# Altium PCB 光电插板1路.PCBDOC
Units mm, origin at the board's own origin, x right, y up, seen from the top; angles counter-clockwise.
Board outline 85.45 x 30.8 mm, 2 copper layers (Top Layer, Bottom Layer); 20 components, 16 nets, 47 pads, 14 vias.
Unrouted connection lines stored in the file: 2.
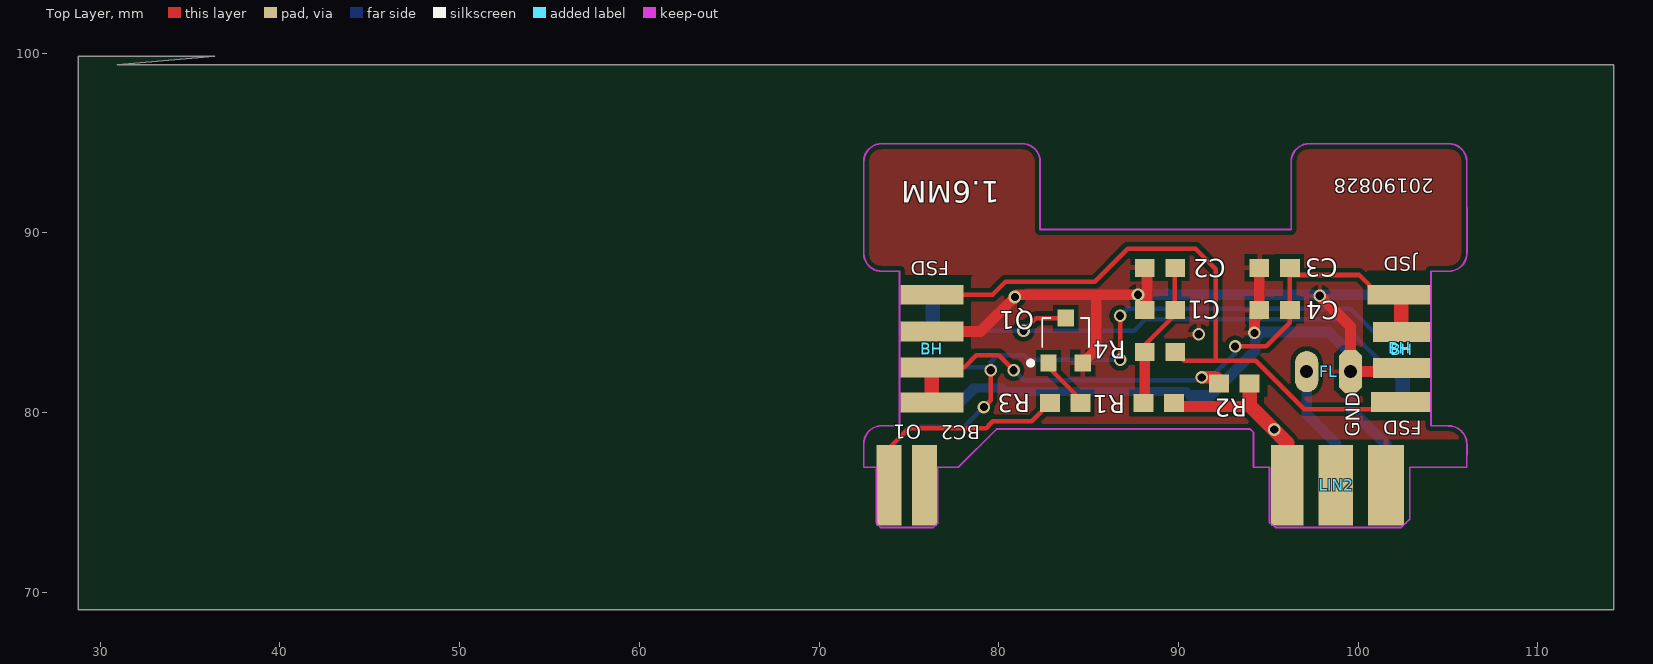
[diagram p0: Top Layer view]
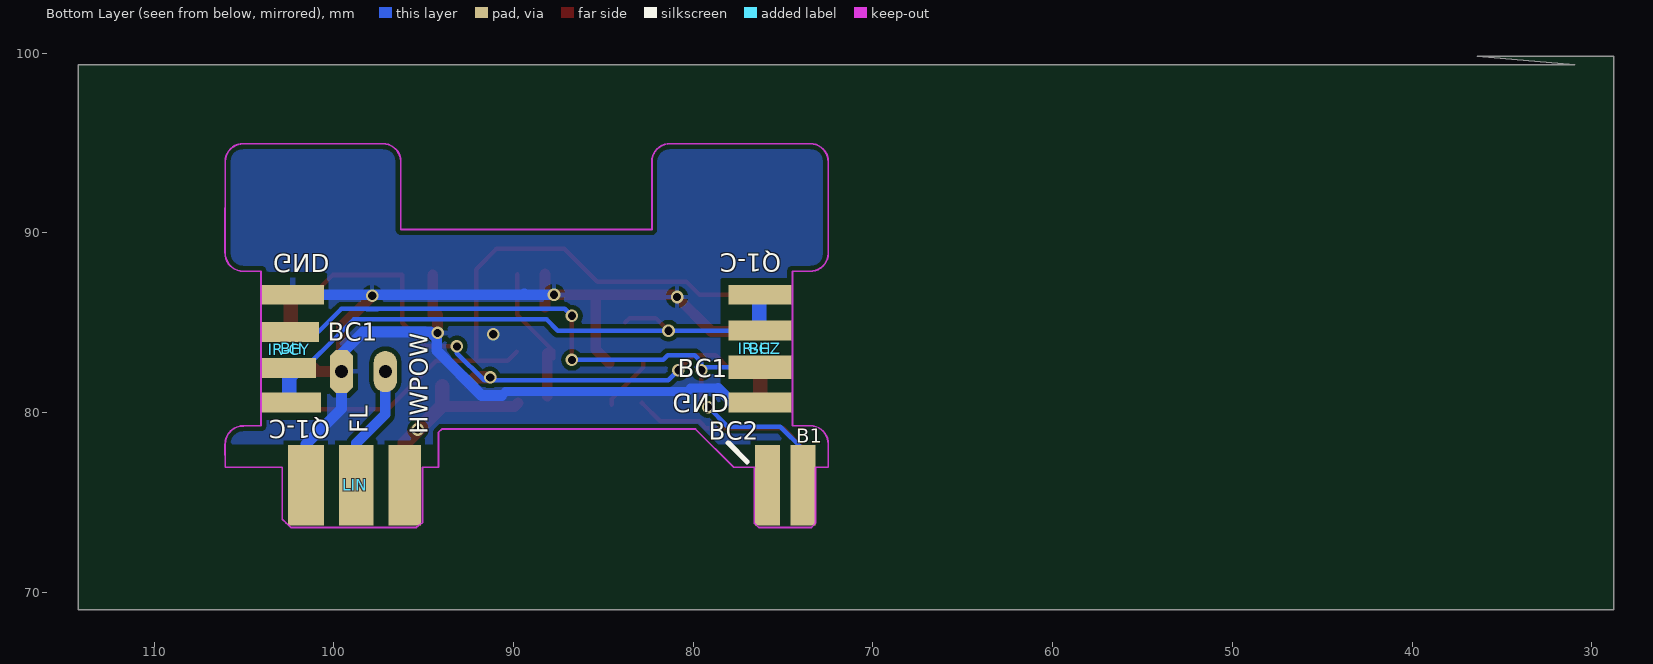
[diagram p1: Bottom Layer view, seen from below]

## Layer stack, top to bottom
Top Layer: signal copper 0.0356
Dielectric: dielectric 0.32, FR-4, Dk 4.8
Bottom Layer: signal copper 0.0356

## Board outline
30.95,99.35 114.225,99.35 114.225,69.025 28.775,69.025 28.775,99.825 36.375,99.825

## Design rules (kind name [scope] priority, off if disabled: settings)
Clearance [All] p1: gap=0.254
FabricationTestPointUsage TestPointUsage [All] p1: valid=0 allowmultiple=FALSE
FabricationTestpoint Testpoint [All] p1: side=3 testpointundercomponent=TRUE minsize=1.016 maxsize=2.54 preferedsize=1.524 minholesize=0 maxholesize=1.016 preferedholesize=0.813 testpointgrid=0.025 allowsidetop=TRUE allowsidebottom=TRUE usegrid=TRUE gridtolerance=0
PolygonConnect [All] p1: connectstyle=Relief reliefconductorwidth=0.254 reliefentries=4 polygonreliefangle="90 Angle"
RoutingVias [All] p1: holewidth=0.46 width=0.7 viastyle="Through Hole" minholewidth=0.4 minwidth=0.7 maxholewidth=1 maxwidth=2
SilkscreenOverComponentPads [All] p1: minsilkscreentomaskgap=0.254
SolderMaskExpansion [All] p1: expansion=0.102
Width Width_6 [InNet('Net1C_1')] p1: maxlimit=1 minlimit=0.254 preferedwidth=0.6 minimp=50.000000 maximp=50.000000 favimp=50.000000
Width Width_5 [InNet('FL')] p2: maxlimit=1 minlimit=0.254 preferedwidth=0.6 minimp=50.000000 maximp=50.000000 favimp=50.000000
Width Width_4 [InNet('GND')] p3: maxlimit=2 minlimit=0.254 preferedwidth=0.6 minimp=50.000000 maximp=50.000000 favimp=50.000000
Width Width_3 [InNet('5V')] p4: maxlimit=1 minlimit=0.254 preferedwidth=0.6 toplayer_prefwidth=0.4 minimp=50.000000 maximp=50.000000 favimp=50.000000
Width Width_2 [InNet('3V3')] p5: maxlimit=1 minlimit=0.254 preferedwidth=0.6 minimp=50.000000 maximp=50.000000 favimp=50.000000
Width Width_1 [InNet('3.3V')] p6: maxlimit=1 minlimit=0.254 preferedwidth=0.6 minimp=50.000000 maximp=50.000000 favimp=50.000000
Width [All] p7: maxlimit=1 minlimit=0.254 preferedwidth=0.254 minimp=50.000000 maximp=50.000000 favimp=50.000000
25 further rules are at their usual default settings.

## Components (designator, comment, footprint, x,y, rotation, side; value= is the part's Value field where it differs from the comment)
BH "" HDR1X2#1 102.533,85.095 r270 top
BH "" HDR1X2#2 102.525,85.019 r270 top
BH "" HDR1X2#3 75.95,85.044 r270 top
BH "" HDR1X2#4 76.625,85.095 r270 top
BH "" HDR1X2#5 102.375,82.015 r90 bottom
BH "" HDR1X2#4 76.625,82.015 r90 bottom
C1 "10uf" CR1608-0603 88.975,85.7 r180 top (schematic designator R6)
C2 "0.01uf" CR1608-0603 88.975,88.05 r180 top (schematic designator R6)
C3 "0.01uf" CR1608-0603 95.35,88.05 r0 top (schematic designator R6)
C4 "0.1uf" CR1608-0603 95.35,85.7 r180 top (schematic designator R6)
FL "2.54" HDR1X2#6 99.673,82.275 r180 top
IR-CY "PH2.0-2*4" HDR1X2#7 102.575,85.019 r270 bottom (schematic designator BH)
IR-CZ "PH2.0-2*4" HDR1X2#8 76.435,85.019 r270 bottom (schematic designator BH)
LIN "HWPOW  FL GND" MHDR1X3#1 97.315,75.875 r0 bottom
LIN2 "HWPOW  GND  GND" MHDR1X3#2 97.315,75.875 r0 top
Q1 "S8050" SO-G3/C2.5 83.725,84 r0 top (schematic designator U4)
R1 "100" CR1608-0603 88.9,80.525 r180 top (schematic designator 4R)
R2 "100" CR1608-0603 93.1,81.6 r180 top (schematic designator 4R)
R3 "4.7K" CR1608-0603 83.7,80.525 r180 top (schematic designator 3R)
R4 "470" CR1608-0603 88.975,83.375 r0 top (schematic designator 4R)

## Footprints (in the part's own frame and the unit in brackets; to place one, negate y for a bottom-side part, rotate by r counter-clockwise, add the part's x,y. Pads: shape width x height; smd on the part's side, far side on the other; paste and mask are expansions set on the pad)
CR1608-0603 [mm]
  rect 1.1x1 smd: 1(-0.85,0) 2(0.85,0)
HDR1X2#1 [mm]
  rect 1.1x3.5 smd: 1(-1.46,-0.258)
  rect 1.1x3.3 smd: 2(4.52,-0.158)
HDR1X2#2 [mm]
  rect 1.1x3.2 smd: 1(0.54,-0.09) 2(2.54,-0.09)
HDR1X2#3 [mm]
  rect 1.1x3.5 smd: 1(0.54,0.325) 2(2.54,0.325)
HDR1X2#4 [mm]
  rect 1.1x3.5 smd: 1(-1.46,-0.35) 2(4.54,-0.35)
HDR1X2#5 [mm]
  rect 1.1x3.3 smd: 1(-1.46,0)
  rect 1.1x3.5 smd: 2(4.54,-0.09)
HDR1X2#6 [mm] "Connector; Header; 2 Position"
  oct 1.3x2.4 hole 0.72: 1(0.1,0)
  oval 1.3x2.3 hole 0.72: 2(2.54,0)
HDR1X2#7 [mm]
  rect 1.1x3.2 smd: 1(0.54,0.14)
  rect 1.1x3 smd: 2(2.54,0.075)
HDR1X2#8 [mm]
  rect 1.1x3.5 smd: 1(0.464,0.14)
  rect 1.3x3.5 smd: 2(2.494,0.142)
MHDR1X3#1 [mm]
  rect 1.8x4.5 smd: 1(-1.262,-0.075)
  rect 1.9x4.5 smd: 2(1.438,-0.075)
  rect 2x4.5 smd: 3(4.235,-0.075)
MHDR1X3#2 [mm]
  rect 1.8x4.5 smd: 1(-1.262,0.075)
  rect 1.9x4.5 smd: 2(1.438,0.075)
  rect 2x4.5 smd: 3(4.235,0.075)
SO-G3/C2.5 [mm] "SOT-23;"
  rect 0.9x0.95 smd: 1(-0.95,-1.25) 2(0.95,-1.25) 3(0,1.25)
  silkscreen extent -2.07,-1.37 1.3,1.25

## Part data
BH BH BH BH BH BH IR-CY IR-CZ: library part "Header 2"
C1 C2 C3 C4 R1 R2 R3 R4: library part Res3, "Resi"
Q1: library part QNPN, "NPN Bipolar Transistor"

## Free pads (board coordinates)
  rect 1.4x4.5 smd: 0(73.895,75.95) 0(75.875,75.95)
  rect 1.4x4.5 smd far side: 0(73.895,75.95) 0(75.875,75.95)

## Via types
v1: diameter 0.7, hole 0.46, Top Layer to Bottom Layer, 14 vias

## Nets (pads, with @x,y where several pads share a name; then routed paths per layer and width w, separated by ;. In a path a pad name is that pad's centre, name@x,y a point inside that pad or via, vN(x,y) a via of type N, cw(c..) or ccw(c..) an arc to the next point about the centre after c; other vN are vias at no path point)
1Q-B: 
1Q-C: BH.1@102.375,80.555 BH.2@76.275,86.555 IR-CY.2 IR-CZ.1 Q1.3 | length 39.8
  Top Layer w0.254: v1(81.375,84.55) 82.075,85.25 83.55,85.25 Q1.3@83.775,85.025
  Bottom Layer w0.254: BH.2@76.275,86.555 76.275,85.542 76.295,85.522 IR-CZ.1 87.53,84.555 88.15,85.175 98.9,85.175 102.5,81.575 IR-CY.2 102.5,81.557 102.375,81.432 BH.1@102.375,80.555
  Bottom Layer w0.8: IR-CZ.1@76.323,84.55 BH.2@76.323,86.63 ; BH.1@102.473,80.5 IR-CY.2@102.473,82.58
2Q-B: Q1.1 R3.1 | length 3
  Top Layer w0.254: Q1.1 82.775,82.5 84.525,80.75 R3.1@84.525,80.425
2Q-C: 
2R: 
3.3V: LIN2.2
4R: C1.1 C2.1 R1.2 R4.1 | length 7.9
  Top Layer w0.254: R4.1@87.8,83.025 87.8,83.425 89.8,85.425 C2.1@89.8,87.7
  Top Layer w0.6: R1.2@88.125,80.9 R4.1@88.125,83.3
38BC1: IR-CY.1 IR-CZ.2 pad.0@73.895,75.95 | length 40.9
  Top Layer w0.254: v1(79.175,80.3) 79.55,80.675 v1(79.55,82.35) ; v1(86.75,82.925) v1@86.75,85.6
  Bottom Layer w0.254: pad.0@73.895,75.95 73.895,77.945 75.15,79.2 78.075,79.2 v1(79.175,80.3) ; IR-CZ.2 v1@79.8,82.525 ; v1(79.55,82.35) 79.55,82.8 79.925,83.175 81.425,83.175 81.675,82.925 v1(86.75,82.925) ; v1(86.75,85.375) 87.15,85.775 97.544,85.775 97.563,85.756 98.169,85.756 98.188,85.775 99.575,85.775 100.871,84.479 IR-CY.1
38BC2: pad.0@75.875,75.95
38OUT-1: pad.0@73.895,75.95 R3.2 | length 12.1
  Top Layer w0.254: pad.0@73.895,75.95 73.895,78.02 75,79.125 79.315,79.125 79.444,79.254 79.444,79.283 79.667,79.506 81.831,79.506 R3.2
38OUT-2: pad.0@75.875,75.95
FL: FL.2 LIN.2 | length 7
  Bottom Layer w0.6: FL.2 97.133,79.903 98.753,78.283 LIN.2
FS-D: BH.1@76.275,86.555 BH.2@102.375,80.575 R4.2 | length 36.4
  Top Layer w0.254: BH.1@76.275,86.555 79.655,86.555 80.375,87.275 85.35,87.275 87.175,89.1 90.95,89.1 92.075,87.975 92.075,82.925 ; R4.2 90.325,82.875 94.3,82.875 97,80.175 101.975,80.175 BH.2@102.375,80.575
GND: BH.1@76.275,80.555 BH.1@76.275,84.504 BH.2@102.285,86.555 BH.2@102.435,82.479 C1.2 C2.2 C3.1 C4.2 FL.1 LIN2.3 LIN.3 Q1.2 | length 78.3
  Top Layer w0.6: BH.1@76.275,84.504 78.979,84.504 81.025,86.55 v1(87.75,86.55) ; Q1.2 85.421,83.496 85.421,86.329 ; C1.2@88.25,85.875 C2.2@88.25,87.7 ; v1(94.225,84.425) 94.225,85.425 94.5,85.425 94.5,86.512 ; 94.5,86.513 C3.1@94.5,87.65 ; v1(97.866,86.487) 99.573,84.78 FL.1 100.889,82.275 101.093,82.479 BH.2@102.435,82.479
  Bottom Layer w0.5: 78.625,81.35 80.15,81.35 80.343,81.157 90.443,81.157 90.65,80.95
  Bottom Layer w0.6: BH.1@76.275,80.555 77.83,80.555 78.625,81.35 ; v1(87.75,86.55) 89.369,86.55 89.408,86.589 89.441,86.555 v1@97.934,86.555 ; 90.65,80.95 91.775,80.95 94.266,83.441 94.266,84.116 94.625,84.475 98.365,84.475 99.573,83.267 FL.1 99.573,80.209 101.55,78.232 LIN.3 ; v1(97.866,86.487) v1@97.934,86.555 ; BH.2@102.285,86.555 v1@97.934,86.555
  other v1: 91.125,84.35 80.9,86.425
HWPOW: LIN2.1 LIN.1 R1.1 R2.1 | length 10.3
  Top Layer w0.6: R1.1 89.95,80.325 94.125,80.325
  Top Layer w0.8: R2.1@93.975,81.45 93.975,80.375 96.05,78.3 LIN2.1@96.05,76.425
  other v1: 95.325,79.05
JS-D: BH.1@102.275,86.555 BH.1@102.435,84.479 BH.2@76.275,80.555 BH.2@76.275,82.504 C3.2 C4.1 R2.2 | length 37.2
  Top Layer w0.254: BH.2@76.275,82.504 78.079,82.504 78.75,83.175 80,83.175 v1(80.825,82.35) v1@80.825,82.55 ; v1(93.15,83.675) 94.875,83.675 96.2,85 96.2,86.512 96.2,87.65 100.05,87.65 101.145,86.555 BH.1@102.275,86.555
  Top Layer w0.7: v1(91.3,81.95) 92.016,81.95 92.035,81.931 92.118,81.931 R2.2@92.45,81.6
  Top Layer w0.8: BH.2@76.275,80.555 BH.2@76.275,82.504 ; BH.1@102.398,84.45 BH.1@102.398,86.53
  Bottom Layer w0.254: v1@80.825,82.55 v1(80.825,82.35) 81.387,81.788 91.638,81.788 93.15,83.3 v1(93.15,83.675)

## Polygon pours and split planes (outlines as drawn)
GND on Bottom Layer "Top Layer-No Net" (solid, remove dead copper, pour order 6): 72.485,78.237 79.325,78.237 79.45,78.362 80.15,79.062 80.175,79.062 93.847,79.062 94.024,78.885 94.175,78.885 94.175,78.512 94.45,78.237 106.046,78.237 106.046,78.691 105.675,79.062 105.495,79.242 104.85,79.242 104.046,79.242 103.726,79.562 100.375,79.562 100.375,87.662 100.35,87.687 100.5,87.837 104.046,87.837 105.04,87.837 105.05,87.847 105.065,87.862 105.55,87.862 106,88.312 106.075,88.387 106.075,89.237 106.075,93.913 106.046,93.942 105.975,94.013 105.975,94.387 105.6,94.762 105.42,94.942 105.034,94.942 97.287,94.942 97.232,94.887 96.825,94.887 96.425,94.487 96.275,94.337 96.275,94.237 96.275,90.171 96.271,90.167 82.301,90.167 82.301,94.023 82.25,94.074 82.25,94.562 82.1,94.562 81.775,94.887 81.72,94.942 81.285,94.942 73.485,94.942 73.43,94.887 73.05,94.887 72.925,94.887 72.675,94.637 72.475,94.437 72.475,94.312 72.475,93.906 72.485,93.896 72.485,88.842 72.485,88.452 72.65,88.287 72.95,87.987 72.95,87.937 73.125,87.937 73.25,87.812 73.28,87.842 73.485,87.842 74.485,87.842 74.475,87.832 74.475,87.487 78.425,87.487 78.5,87.412 78.5,79.412 74.655,79.412 74.485,79.242 74.48,79.237 73.2,79.237 73,79.237 72.7,78.937 72.485,78.722 72.485,78.237
GND on Top Layer "Top Layer-No Net" (solid, remove dead copper, pour order 8): 72.475,78.3 79.315,78.3 79.34,78.275 80.165,79.1 80.165,79.125 93.836,79.125 94.013,78.948 94.165,78.948 94.165,78.7 94.14,78.675 94.315,78.5 106.04,78.5 106.04,78.725 105.89,78.875 105.59,79.175 105.59,79.225 104.765,79.225 104.64,79.35 104.036,79.35 104.036,79.571 104.065,79.6 104.015,79.55 100.24,79.55 100.24,87.6 100.44,87.8 100.54,87.9 104.036,87.9 105.34,87.9 105.415,87.975 105.715,88.275 105.915,88.275 105.915,88.8 106.04,88.925 106.015,88.95 106.015,89.55 106.015,94.3 105.965,94.35 105.59,94.725 105.59,94.9 105.129,94.9 105.024,95.005 104.944,94.925 97.09,94.925 96.69,94.925 96.44,94.675 96.265,94.5 96.265,94.225 96.265,93.963 96.261,93.959 96.261,90.23 82.291,90.23 82.291,94.086 82.291,94.574 82.04,94.825 81.89,94.975 81.565,94.975 73.505,94.975 73.475,95.005 73.445,94.975 72.915,94.975 72.915,94.9 72.54,94.525 72.475,94.46 72.475,93.987 72.475,88.86 72.465,88.85 72.59,88.725 72.59,88.375 72.59,88.25 72.84,88 72.935,87.905 73.493,87.905 74.475,87.905 74.54,87.84 74.54,87.675 78.465,87.675 78.54,87.6 78.465,87.525 78.465,79.675 74.6,79.675 74.475,79.55 74.475,79.305 73.44,79.305 73.235,79.1 72.79,79.1 72.79,78.925 72.59,78.725 72.475,78.61 72.475,78.287

## Keep-outs
Keep-Out Layer:
  lines w0.1: 72.485,78.237 cw(c73.485,78.255) 73.485,79.255 ; 72.485,78.25 72.485,76.955 73.155,76.955 ; 72.485,88.8 72.485,93.909 ; 72.485,88.855 ccw(c73.485,88.855) 73.503,87.855 ; 72.485,93.937 cw(c73.485,93.955) 73.485,94.955 81.285,94.955 ; 73.195,73.85 73.425,73.6 76.35,73.6 ; 73.2,73.85 73.2,76.955 ; 73.45,79.255 74.451,79.255 ; 73.485,87.855 74.485,87.855 74.485,79.255 ; 76.355,73.6 76.6,73.85 ; 76.595,76.955 77.751,76.951 79.875,79.075 93.998,79.075 94.175,78.898 94.175,76.95 ; 76.6,73.825 76.6,76.955 ; 81.283,94.955 cw(c81.301,93.955) 82.301,93.955 ; 82.301,94.036 82.301,90.18 96.271,90.18 96.271,93.909 ; 94.175,76.956 95.065,76.956 ; 95.065,76.955 95.065,73.875 95.406,73.6 102.39,73.6 102.661,73.856 102.865,74.06 102.865,76.955 106.046,76.955 106.05,78.25 ; 96.271,93.937 cw(c97.271,93.955) 97.271,94.955 ; 97.287,94.955 105.034,94.955 ; 104.046,87.85 104.046,79.255 105.125,79.255 ; 104.046,87.86 105.05,87.86 ; 105.028,79.25 cw(c105.046,78.25) 106.046,78.25 ; 105.028,94.955 cw(c105.046,93.955) 106.046,93.955 ; 105.046,87.86 ccw(c105.046,88.86) 106.046,88.878 ; 106.046,93.909 106.05,88.875

## Silkscreen, mask and mechanical layers (free items; w line width, h text height)
Top Overlay:
  text "20190828" at 104.2,93 h0.8 r180
  text "1.6MM" at 80.05,92.875 h1.2 r180
  text "JSD" at 103.3,88.65 h0.8 r180
  text "FSD" at 77.25,88.425 h0.8 r180
  text "FSD" at 103.525,79.55 h0.8 r180
  text "O1" at 75.7,79.325 h0.8 r180
  text "BC2" at 78.975,79.3 h0.8 r180
  text "GND" at 100.1,78.65 h0.8 r90
Bottom Overlay:
  lines w0.3: 77.006,77.256 78.05,78.3
  text "Q1-C" at 75.1,88.825 h1 r180
  text "GND" at 103.375,88.8 h1 r180
  text "BC1" at 100.35,84 h1
  text "BC1" at 80.875,81.95 h1
  text "GND" at 81.15,81 h1 r180
  text "Q1-C" at 100.207,79.575 h1 r180
  text "FL" at 98.1,78.85 h1 r270
  text "HWPOW" at 94.775,78.775 h1 r270
  text "BC2" at 79.125,78.475 h1
  text "B1" at 74.275,78.325 h0.8